# Altium PCB ex1 copy_2021-06-25.pcbdoc
Units mm, origin at the board's own origin, x right, y up, seen from the top; angles counter-clockwise.
Board outline 270.76 x 197.61 mm, 2 copper layers (Top Layer, Bottom Layer); 18 components, 46 nets, 138 pads, 20 vias.
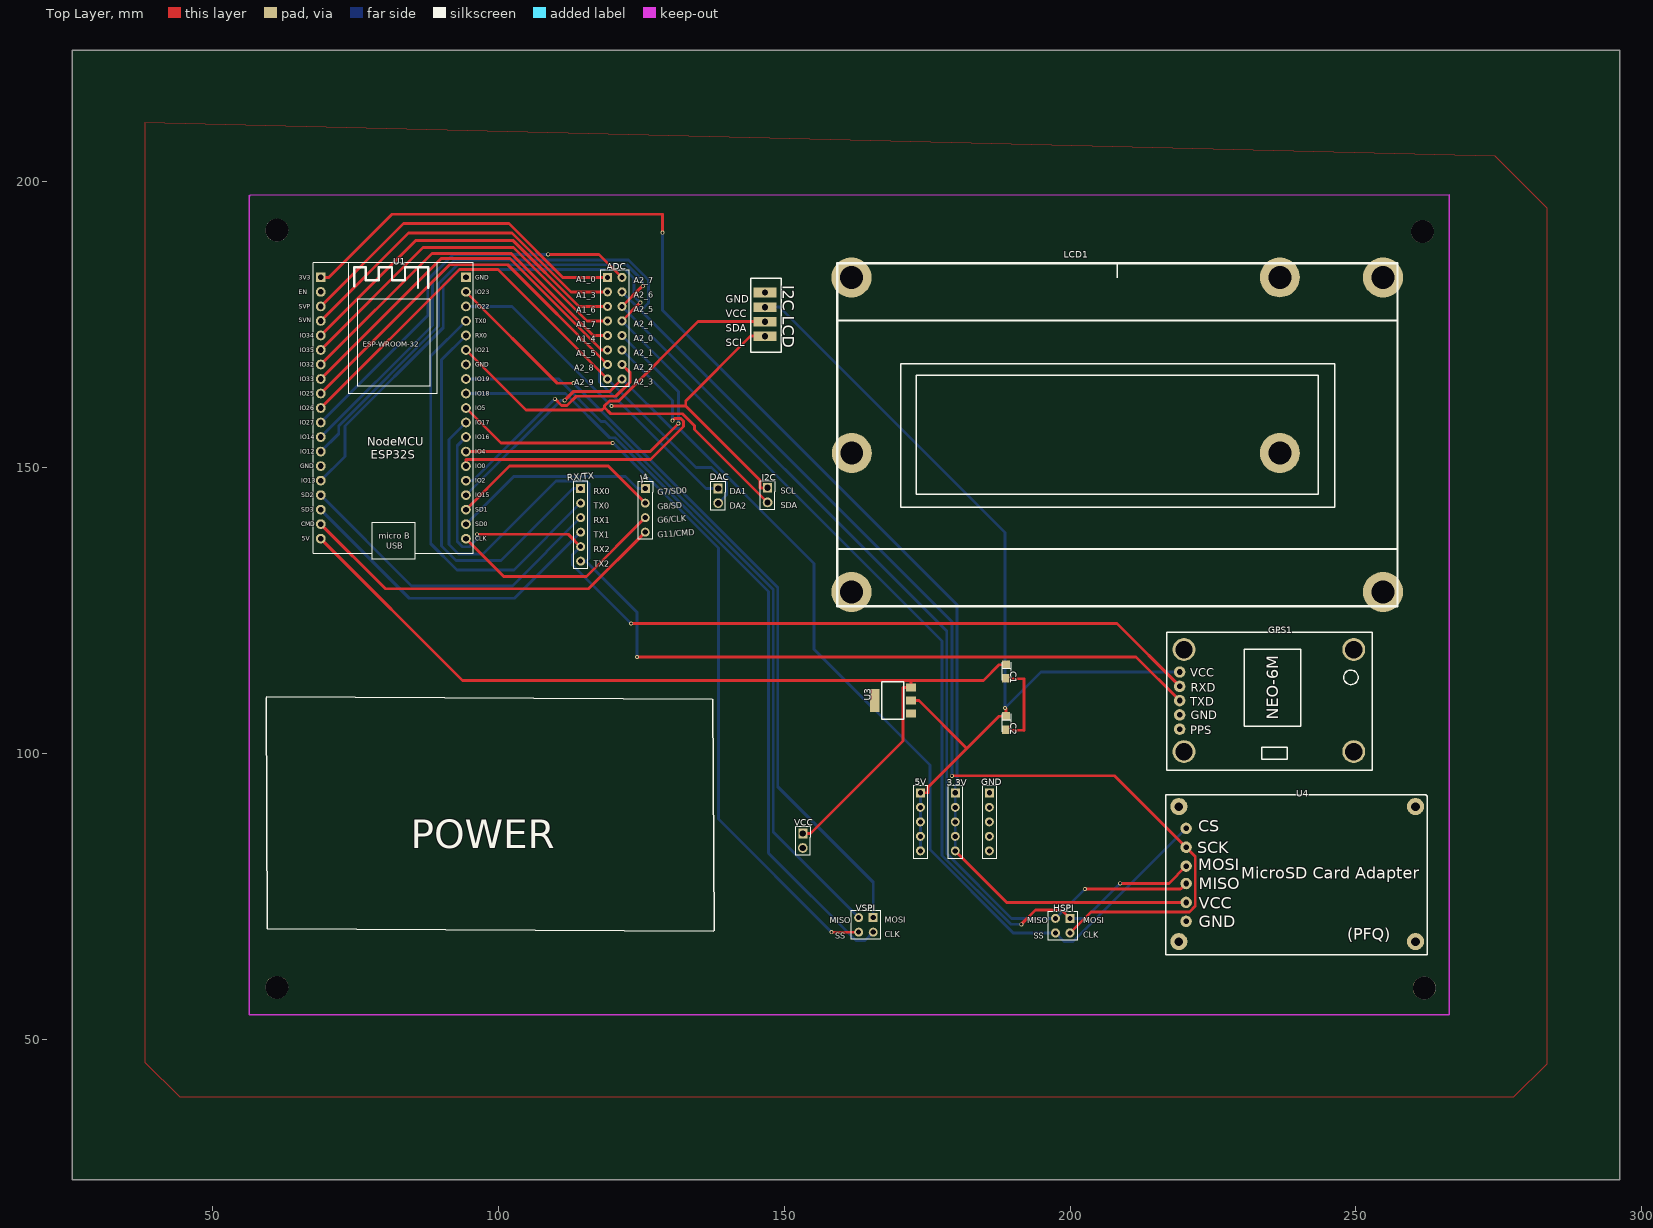
[diagram p0: Top Layer view]
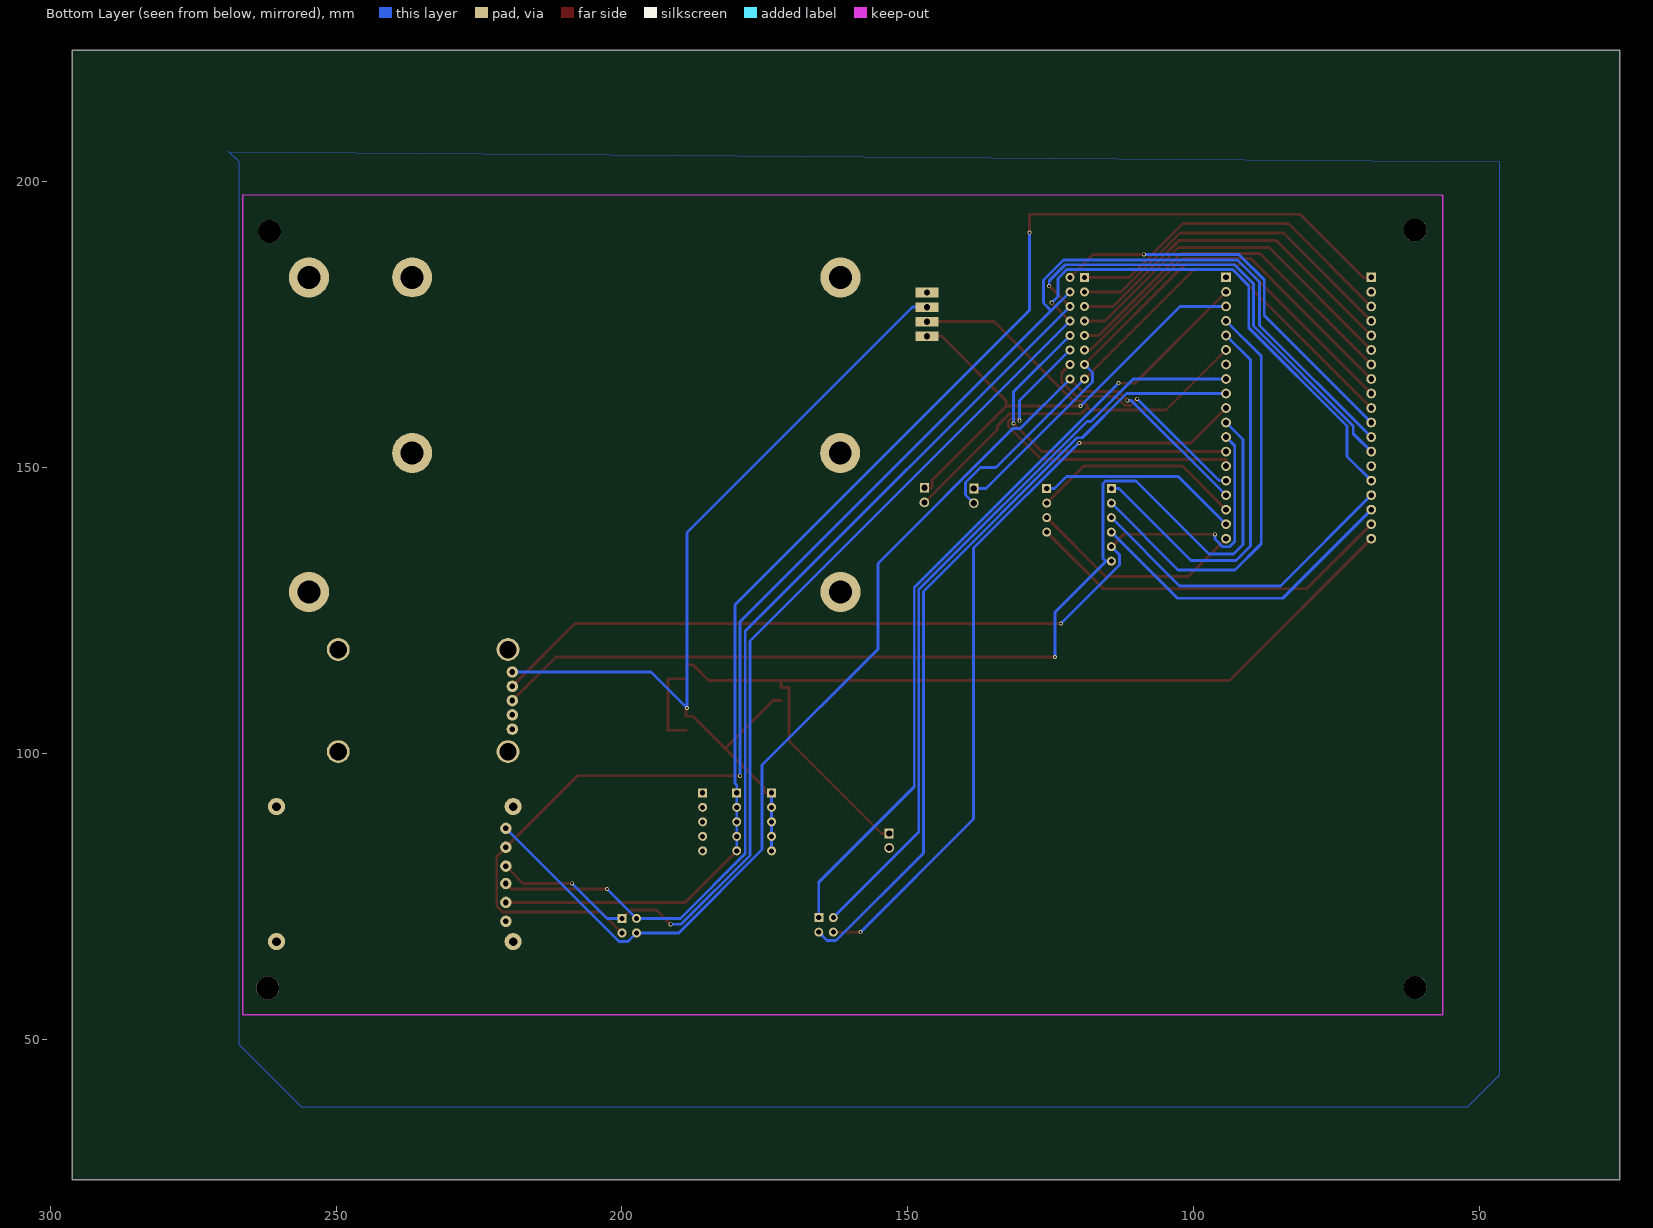
[diagram p1: Bottom Layer view, seen from below]

## Layer stack, top to bottom
Top Layer: signal copper (thickness not stored)
Dielectric: dielectric 0.32, FR-4, Dk 4.8
Bottom Layer: signal copper (thickness not stored)

## Board outline
296.164,25.4 25.4,25.4 25.4,223.012 296.164,223.012

## Components (designator, comment, footprint, x,y, rotation, side; value= is the part's Value field where it differs from the comment)
3.3V "3.3V" HDR-M-2.54_1X5 179.894,88.01 r270 top
5V "5V" HDR-M-2.54_1X5 173.798,88.01 r270 top
ADC "ADC" HDR-M-2.54_2X8 120.331,174.37 r270 top
C1 "100u/16V" CASE-A_3216 188.784,114.299 r270 top
C2 "22u/16V" CASE-A_3216 188.784,105.282 r270 top
DAC "DAC" HDR-M-2.54_1X2 138.43,145.034 r270 top
GND "GND" HDR-M-2.54_1X5 185.863,88.01 r270 top
GPS1 "Ublox Neo-m8n module_MOP" UBLOX_NEO-6M_GPS_MODULE 234.758,109.219 r0 top
HSPI "HDR-M-2.54_2x2" HDR-M-2.54_2X2 198.69,69.849 r270 top
I2C "HDR-M-2.54_1x2" HDR-M-2.54_1X2 147.066,145.161 r270 top
J4 "HDR-M-2.54_1x4" HDR-M-2.54_1X4 125.665,142.493 r270 top
LCD1 "LCD_Display_20x4 V3 I2C" "LCD_2004_4-8BIT_IF LCD_2004_4-8BIT_IF V4 I2C" 161.86,183.133 r0 top
RX/TX "RX/TX" HDR-M-2.54_1X6 114.362,139.953 r270 top
U1 "NODEMCU_ESP32-DEVKITC" NODEMCU-ESP32S 66.356,188.34 r0 top
U3 "AMS1117" AMS1117 164.781,105.917 r90 top
U4 "MICRO SD CARD ADAPTER ARDUINO" "MICROSD CARD ADAPTER (PFQ)" 239.33,78.993 r0 top
VCC "VCC/GND 5V-14V" HDR-M-2.54_1X2 153.224,84.708 r270 top
VSPI "HDR-M-2.54_2x2" HDR-M-2.54_2X2 164.273,69.976 r270 top

## Footprints (in the part's own frame and the unit in brackets; to place one, negate y for a bottom-side part, rotate by r counter-clockwise, add the part's x,y. Pads: shape width x height; smd on the part's side, far side on the other; paste and mask are expansions set on the pad)
AMS1117 [mm]
  rect 1.4x1.7 smd: 1(1.016,-7.366) 2(3.302,-7.366) 3(5.588,-7.366)
  rect 4x1.7 smd: 4(3.302,-1.016)
  silkscreen extent 0,-6.1 6.6,-2.29
CASE-A_3216 [mm]
  rect 1.5x1.359 smd: 1(-1.2,0) 2(1.2,0)
  silkscreen extent -1.64,-0.76 1.56,0.84
HDR-M-2.54_1X2 [mm]
  rect 1.7x1.575 hole 1.1: 1(-1.27,0)
  round 1.7 hole 1.1: 2(1.27,0)
  silkscreen extent -2.54,-1.27 2.54,1.27
HDR-M-2.54_1X4 [mil]
  rect 62x62 hole 35: 1(-150,0)
  round 62 hole 35: 2(-50,0) 3(50,0) 4(150,0)
  silkscreen extent -200,-50 200,50
HDR-M-2.54_1X5 [mil]
  rect 62x62 hole 35: 1(-200,0)
  round 62 hole 35: 2(-100,0) 3(0,0) 4(100,0) 5(200,0)
  silkscreen extent -250,-50 250,50
HDR-M-2.54_1X6 [mil]
  rect 62x62 hole 35: 1(-250,0)
  round 62 hole 35: 2(-150,0) 3(-50,0) 4(50,0) 5(150,0) 6(250,0)
  silkscreen extent -300,-50 300,50
HDR-M-2.54_2X2 [mil]
  rect 62x62 hole 35: 1(-50,50)
  round 62 hole 35: 2(50,50) 3(-50,-50) 4(50,-50)
  silkscreen extent -100,-100 100,100
HDR-M-2.54_2X8 [mil]
  rect 62x62 hole 35: 1(-350,-50)
  round 62 hole 35: 2(-350,50) 3(-250,-50) 4(-250,50) 5(-150,-50) 6(-150,50) 7(-50,-50) 8(-50,50) 9(50,-50) 10(50,50) 11(150,-50) 12(150,50) 13(250,-50) 14(250,50) 15(350,-50) 16(350,50)
  silkscreen extent -400,-100 400,100
"LCD_2004_4-8BIT_IF LCD_2004_4-8BIT_IF V4 I2C" [mm]
  rect 4x1.7 hole 1.1: 1(-15.24,-2.54) 2(-15.24,-5.08) 3(-15.24,-7.62) 4(-15.24,-10.16)
  round 7 hole 4: 1(-0.123,-54.905) 1(-0.123,0.097) 1(92.877,-54.905) 1(92.877,0.097)
  silkscreen extent -17.78,-57.4 95.38,2.6
"MICROSD CARD ADAPTER (PFQ)" [mm]
  round 2 hole 1: 1(-19.05,7.874) 2(-19.05,4.572) 3(-19.05,1.27) 4(-19.05,-1.778) 5(-19.05,-5.08) 6(-19.05,-8.382)
  round 3 hole 1.5: 7(21.082,11.684) 8(21.082,-11.938) 9(-20.32,-11.938) 10(-20.32,11.684)
  silkscreen extent -22.61,-14.22 23.11,13.72
NODEMCU-ESP32S [mm]
  rect 1.7x1.7 hole 1: 1(2.54,-5.08) 38(27.94,-5.08)
  round 1.7 hole 1: 2(2.54,-7.62) 3(2.54,-10.16) 4(2.54,-12.7) 5(2.54,-15.24) 6(2.54,-17.78) 7(2.54,-20.32) 8(2.54,-22.86) 9(2.54,-25.4) 10(2.54,-27.94) 11(2.54,-30.48) 12(2.54,-33.02) 13(2.54,-35.56) 14(2.54,-38.1) 15(2.54,-40.64) 16(2.54,-43.18) 17(2.54,-45.72) 18(2.54,-48.26) 19(2.54,-50.8) 20(27.94,-50.8) 21(27.94,-48.26) 22(27.94,-45.72) 23(27.94,-43.18) 24(27.94,-40.64) 25(27.94,-38.1) 26(27.94,-35.56) 27(27.94,-33.02) 28(27.94,-30.48) 29(27.94,-27.94) 30(27.94,-25.4) 31(27.94,-22.86) 32(27.94,-20.32) 33(27.94,-17.78) 34(27.94,-15.24) 35(27.94,-12.7) 36(27.94,-10.16) 37(27.94,-7.62)
  silkscreen extent 1.27,-54.32 29.21,-2.54
UBLOX_NEO-6M_GPS_MODULE [mm]
  round 2 hole 1: 1(-15.6,5) 2(-15.6,2.5) 3(-15.6,0) 4(-15.6,-2.5) 5(-15.6,-5)
  round 4 hole 3.05: 11(-14.85,8.925) 12(14.85,8.925) 13(14.85,-8.925) 14(-14.85,-8.925)
  silkscreen extent -17.87,-12.22 18.13,11.95

## Free pads (board coordinates)
  round 7 hole 4: 1(161.798,152.527) 1(236.677,152.53) 1(236.677,183.251)
  round 4 hole 4 unplated: ""(61.214,59.055) ""(61.214,191.516) ""(261.62,191.262) ""(261.936,58.927)
  round 3 hole 3 unplated: ""(161.798,152.527) ""(236.677,152.53) ""(236.677,183.251)

## Via types
v1: diameter 0.7, hole 0.4, Top Layer to Bottom Layer, 20 vias

## Nets (pads, with @x,y where several pads share a name; then routed paths per layer and width w, separated by ;. In a path a pad name is that pad's centre, name@x,y a point inside that pad or via, vN(x,y) a via of type N, cw(c..) or ccw(c..) an arc to the next point about the centre after c; other vN are vias at no path point)
3.3V: 3.3V.1 3.3V.2 3.3V.3 3.3V.4 3.3V.5 U1.1 U4.5 | length 241.3
  Top Layer w0.5: U1.1 70.3,183.258 81.351,194.31 128.692,194.31 v1(128.692,191.084) ; 3.3V.5@179.895,82.928 188.912,73.911 U4.5@220.281,73.911
  Bottom Layer w0.5: v1(128.692,191.084) 128.692,177.508 180.208,125.989 180.208,94.745 179.895,94.43 179.895,93.088 179.895,90.548 179.895,88.008 179.895,85.468 3.3V.5@179.895,82.928
5V: 5V.1 5V.2 5V.3 5V.4 5V.5 C2.1 GPS1.1 LCD1.2 U3.2 | length 168.2
  Top Layer w0.5: U3.2@172.148,109.217 173.551,109.217 181.92,100.848 ; 5V.1@173.799,93.088 175.138,93.088 175.138,94.066 181.92,100.848 ; v1(188.613,107.909) 188.737,107.785 188.785,107.785 C2.1 188.168,106.482 187.554,106.482 181.92,100.848
  Bottom Layer w0.5: LCD1.2@146.621,178.051 149.172,178.051 188.613,138.613 v1(188.613,107.909) 194.922,114.219 GPS1.1 ; 5V.5@173.799,82.928 173.799,85.468 173.799,88.008 173.799,90.548 5V.1@173.799,93.088
C1_2: C1.2 C2.2 | length 15.2
  Top Layer w0.5: C2.2 191.897,104.013 191.897,113.03 C1.2
G0/T1: ADC.12 U1.25 | length 60.9
  Top Layer w0.5: U1.25@94.297,150.238 94.297,151.384 126.555,151.384 132.364,157.193 132.364,158.097 131.864,158.595 130.835,158.595 v1(130.424,158.184)
  Bottom Layer w0.5: ADC.12@121.602,170.558 130.421,161.74 130.421,158.184 v1(130.424,158.184)
G1/TX0: RX/TX.2 U1.35 | length 74.5
  Bottom Layer w0.5: U1.35@94.297,175.638 88.138,169.479 88.138,136.652 92.71,132.08 102.682,132.08 RX/TX.2@114.364,143.761
G2/T2: ADC.14 U1.24 | length 40.5
  Top Layer w0.5: v1(109.852,162.022) 111.016,160.858 112.001,160.858 113.602,162.456 120.51,162.456 123.035,164.981 123.035,166.586 ADC.14@121.602,168.018
  Bottom Layer w0.5: U1.24@94.297,147.698 95.529,147.698 v1(109.852,162.022)
G3/RX0: RX/TX.1 U1.34 | length 69.2
  Bottom Layer w0.5: U1.34@94.297,173.098 90.043,168.844 90.043,136.271 92.583,133.731 100.452,133.731 113.022,146.301 RX/TX.1@114.364,146.301
G4/T0: ADC.10 U1.26 | length 58.7
  Top Layer w0.5: U1.26@94.297,152.778 126.54,152.778 v1(131.455,157.693)
  Bottom Layer w0.5: ADC.10@121.602,173.098 131.455,163.246 v1(131.455,157.693)
G5/V_SS: U1.29 VSPI.4 | length 134.5
  Top Layer w0.5: U1.29@94.297,160.398 100.404,154.295 v1(119.967,154.295) ; v1(158.26,68.704) VSPI.4@163.005,68.704
  Bottom Layer w0.5: v1(119.967,154.295) 120.068,154.295 138.455,135.908 138.455,88.509 v1(158.26,68.704)
G6/CLK: J4.3 U1.20 | length 38.4
  Top Layer w0.5: U1.20@94.297,137.538 100.899,130.937 115.382,130.937 J4.3@125.666,141.221
G7/SD0: J4.1 U1.21 | length 35.7
  Bottom Layer w0.5: U1.21@94.297,140.078 102.662,148.445 122.184,148.445 124.325,146.301 J4.1@125.666,146.301
G8/SD1: J4.2 U1.22 | length 37.2
  Top Layer w0.5: U1.22@94.297,142.618 101.92,150.241 119.187,150.241 J4.2@125.666,143.761
G9/RX1/SD2: RX/TX.3 U1.16 | length 57
  Bottom Layer w0.5: U1.16@68.897,145.158 84.77,129.286 102.428,129.286 RX/TX.3@114.364,141.221
G10/TX1/SD3: RX/TX.4 U1.17 | length 56.7
  Bottom Layer w0.5: U1.17@68.897,142.618 84.389,127.127 102.809,127.127 RX/TX.4@114.364,138.681
G11/CMD: J4.4 U1.18 | length 65.6
  Top Layer w0.5: U1.18@68.897,140.078 80.198,128.778 115.763,128.778 J4.4@125.666,138.681
G12/MISO: ADC.6 HSPI.3 U1.13 U4.4 | length 250.5
  Top Layer w0.5: ADC.6@121.602,178.178 125.128,181.707 v1(125.237,181.707) ; v1(202.565,76.263) 219.329,76.263 U4.4@220.281,77.213
  Bottom Layer w0.5: U1.13@68.897,152.778 72.032,155.913 72.032,157.284 89.515,174.767 89.515,182.138 92.842,185.466 122.428,185.466 125.237,182.654 v1(125.237,181.707) ; ADC.6@121.602,178.178 178.405,121.376 178.405,82.474 189.761,71.117 197.421,71.117 v1(202.565,76.263)
G13/MOSI: ADC.8 HSPI.1 U1.15 U4.3 | length 257.2
  Top Layer w0.5: ADC.8@121.602,175.638 v1(124.8,178.839) ; v1(191.442,70.086) 193.937,72.581 198.498,72.581 HSPI.1@199.962,71.117 ; v1(208.74,77.246) 217.264,77.246 U4.3@220.281,80.261
  Bottom Layer w0.5: U1.15@68.897,147.698 73.142,151.945 73.142,157.259 90.317,174.437 90.317,181.806 93.175,184.663 122.095,184.663 123.716,183.04 123.716,179.923 v1(124.8,178.839) ; ADC.8@121.602,175.638 177.602,119.639 177.602,82.141 189.657,70.086 v1(191.442,70.086) ; HSPI.1@199.962,71.117 202.611,71.117 v1(208.74,77.246)
G14/CLK: ADC.4 HSPI.2 U1.12 U4.2 | length 271.5
  Top Layer w0.5: v1(179.306,96.07) 207.777,96.07 220.281,83.563 221.882,81.963 221.882,73.292 220.853,72.26 203.644,72.26 HSPI.2@199.962,68.577
  Bottom Layer w0.5: U1.12@68.897,155.318 88.43,174.851 88.43,182.423 92.273,186.268 122.761,186.268 126.251,182.776 126.251,178.78 124.897,177.427 ; ADC.4@121.602,180.718 124.897,177.427 ; v1(179.306,96.07) 179.306,123.015 124.897,177.427
G15/T3/SS: ADC.16 HSPI.4 U1.23 U4.1 | length 200.8
  Top Layer w0.5: v1(111.575,161.76) 113.073,163.261 119.383,163.261 ADC.16@121.602,165.478
  Bottom Layer w0.5: U1.23@94.297,145.158 110.896,161.76 v1(111.575,161.76) ; ADC.16@121.602,165.478 130.289,156.792 131.608,156.792 155.204,133.195 155.204,118.201 175.456,97.947 175.456,83.152 190.03,68.577 197.421,68.577 198.938,67.061 200.475,67.061 U4.1@220.281,86.865
G16/RX2: GPS1.2 RX/TX.5 U1.27 | length 162
  Top Layer w0.5: v1(96.218,138.311) 112.194,138.311 RX/TX.5@114.364,136.141 ; v1(123.193,122.695) 208.183,122.695 GPS1.2
  Bottom Layer w0.5: U1.27@94.297,155.318 92.773,153.797 92.773,137.061 93.698,136.136 94.897,136.136 96.218,137.46 v1(96.218,138.311) ; RX/TX.5@114.364,136.141 112.941,134.722 112.941,132.946 v1(123.193,122.695)
G17/TX2: GPS1.3 RX/TX.6 U1.28 | length 186.5
  Top Layer w0.5: v1(124.224,116.85) 211.529,116.85 GPS1.3
  Bottom Layer w0.5: U1.28@94.297,157.858 91.313,154.874 91.313,136.525 92.964,134.874 97.282,134.874 110.051,147.643 115.379,147.643 115.799,147.221 115.799,134.102 115.301,133.601 ; RX/TX.6@114.364,133.601 115.301,133.601 ; v1(124.224,116.85) 124.224,124.678 115.301,133.601
G18/V_SCK: U1.30 VSPI.2 | length 138.3
  Bottom Layer w0.5: U1.30@94.297,162.938 111.707,162.938 119.449,155.197 120.348,155.197 147.241,128.3 147.241,82.527 162.507,67.262 164.099,67.262 VSPI.2@165.544,68.704
G19/V_MISO: U1.31 VSPI.3 | length 132.6
  Bottom Layer w0.5: U1.31@94.297,165.478 110.533,165.478 117.947,158.067 118.623,158.067 148.046,128.646 148.046,86.205 VSPI.3@163.005,71.244
G21/I2CSDA: I2C.2 LCD1.3 U1.33 | length 99
  Top Layer w0.5: U1.33@94.297,170.558 104.803,160.056 118.067,160.056 118.519,160.508 ; LCD1.3@146.621,175.511 134.889,175.511 121.031,161.653 119.385,161.653 118.519,160.79 118.519,160.508 ; I2C.2 134.285,156.672 134.285,157.312 132.197,159.398 119.629,159.398 118.519,160.508
G22/I2CSCL: I2C.1 LCD1.4 U1.36 | length 86.2
  Top Layer w0.5: v1(119.758,160.752) 132.745,160.752 ; LCD1.4@146.621,172.971 144.069,172.971 132.745,161.648 132.745,160.752 ; I2C.1 145.727,146.431 145.727,147.77 132.745,160.752
  Bottom Layer w0.5: U1.36@94.297,178.178 102.332,178.178 v1(119.758,160.752)
G23/V_MOSI: U1.37 VSPI.1 | length 140.7
  Top Layer w0.5: U1.37@94.297,180.718 110.279,164.737 v1(113.129,164.737)
  Bottom Layer w0.5: v1(113.129,164.737) 148.849,129.019 148.849,94.145 165.544,77.45 VSPI.1@165.544,71.244
G25/DA1: ADC.13 DAC.1 U1.9 | length 98.9
  Top Layer w0.5: U1.9@68.897,162.938 91.422,185.466 101.618,185.466 ADC.13@119.062,168.018
  Bottom Layer w0.5: ADC.13@119.062,168.018 117.648,166.606 117.648,164.925 136.271,146.304 DAC.1
G26/DA2: ADC.15 DAC.2 U1.10 | length 100.7
  Top Layer w0.5: U1.10@68.897,160.398 93.16,184.661 99.88,184.661 ADC.15@119.062,165.478
  Bottom Layer w0.5: ADC.15@119.062,165.478 134.529,150.012 137.251,150.012 139.863,147.399 139.863,145.197 DAC.2
G27: ADC.2 U1.11 | length 70.2
  Top Layer w0.5: v1(108.684,187.277) 117.584,187.277 ADC.2@121.602,183.258
  Bottom Layer w0.5: U1.11@68.897,157.858 87.625,176.588 87.625,182.837 92.065,187.277 v1(108.684,187.277)
G32/A4: ADC.9 U1.7 | length 64.2
  Top Layer w0.5: U1.7@68.897,168.018 88.331,187.452 102.222,187.452 116.576,173.098 ADC.9@119.062,173.098
G33/A5: ADC.11 U1.8 | length 65.5
  Top Layer w0.5: U1.8@68.897,165.478 89.982,186.563 101.976,186.563 117.98,170.558 ADC.11@119.062,170.558
G34/A6: ADC.5 U1.5 | length 61.8
  Top Layer w0.5: U1.5@68.897,173.098 85.537,189.738 102.492,189.738 114.051,178.178 ADC.5@119.062,178.178
G35/A7: ADC.7 U1.6 | length 62.9
  Top Layer w0.5: U1.6@68.897,170.558 86.807,188.468 102.626,188.468 115.456,175.638 ADC.7@119.062,175.638
G36/A0/SVP: ADC.1 U1.3 | length 60.1
  Top Layer w0.5: U1.3@68.897,178.178 83.378,192.659 101.841,192.659 111.242,183.258 117.721,183.258 ADC.1@119.062,183.258
G39/A3/SVN: ADC.3 U1.4 | length 60.8
  Top Layer w0.5: U1.4@68.897,175.638 84.267,191.008 102.357,191.008 112.646,180.718 ADC.3@119.062,180.718
GND: GND.1 GND.2 GND.3 GND.4 GND.5 GPS1.4 LCD1.1 pad.1 U1.14 U1.32 U1.38 U3.1 U4.6 VCC.2
RST/EN: U1.2
S$43: 
S$59: 
S$63: 
S$68: 
S$71: 
S$560: 
S$562: 
S$564: 
VCC: C1.1 U1.19 U3.3 VCC.1 | length 167.5
  Top Layer w0.5: U1.19@68.897,137.538 93.678,112.758 172.148,112.758 ; VCC.1@153.225,85.976 154.564,85.976 170.744,102.159 170.744,111.503 172.148,111.503 172.148,112.758 ; C1.1 187.554,115.499 184.813,112.758 172.148,112.758
pads on no net: GPS1.5 GPS1.11 GPS1.12 GPS1.13 GPS1.14 U3.4 U4.7 U4.8 U4.9 U4.10

## Polygon pours and split planes (outlines as drawn)
GND on Top Layer (solid): 38.1,210.312 38.1,45.974 44.196,39.878 277.622,39.878 283.464,45.72 283.464,195.326 274.32,204.47
GND on Bottom Layer (solid): 46.482,203.454 46.482,43.688 52.07,38.1 256.032,38.1 266.954,49.022 266.954,203.454 268.732,205.232

## Silkscreen, mask and mechanical layers (free items; w line width, h text height)
Top Overlay:
  lines w0.254: 59.371,109.727 59.498,69.341 ; 59.371,109.854 137.349,109.473 ; 59.572,69.305 137.657,68.868 ; 137.466,109.445 137.73,68.96
  text "A1_0" at 113.6,182.379 h1
  text "A2_7" at 123.633,182.252 h1
  text "A2_6" at 123.633,179.712 h1
  text "A1_3" at 113.6,179.585 h1
  text "A2_5" at 123.633,177.172 h1
  text "A1_6" at 113.6,177.045 h1
  text "A2_4" at 123.633,174.632 h1
  text "A1_7" at 113.6,174.505 h1
  text "A2_0" at 123.633,172.092 h1
  text "A1_4" at 113.6,171.965 h1
  text "A2_1" at 123.633,169.552 h1
  text "A1_5" at 113.6,169.425 h1
  text "A2_2" at 123.633,167.012 h1
  text "A2_8" at 113.219,166.885 h1
  text "A2_3" at 123.633,164.472 h1
  text "A2_9" at 113.219,164.345 h1
  text "SCL" at 149.352,145.423 h1
  text "RX0" at 116.648,145.295 h1
  text "DA1" at 140.462,145.296 h1
  text "G7/SD0" at 127.859,145.169 h1 r4
  text "SDA" at 149.352,142.883 h1
  text "TX0" at 116.648,142.755 h1
  text "DA2" at 140.462,142.756 h1
  text "G8/SD" at 127.859,142.629 h1 r4
  text "RX1" at 116.648,140.215 h1
  text "G6/CLK" at 127.859,140.216 h1 r4
  text "TX1" at 116.648,137.675 h1
  text "G11/CMD" at 127.859,137.676 h1 r4
  text "RX2" at 116.648,135.135 h1
  text "TX2" at 116.648,132.595 h1
  text "POWER" at 84.644,83.351 h5
  text "MOSI" at 167.575,70.365 h1
  text "MISO" at 157.923,70.238 h1
  text "MISO" at 192.467,70.238 h1
  text "MOSI" at 202.246,70.238 h1
  text "CLK" at 167.575,67.825 h1
  text "CLK" at 202.246,67.698 h1
  text "SS" at 158.939,67.571 h1
  text "SS" at 193.61,67.571 h1

## Text inside footprints (layer, text, board x,y; h text height)
GPS1: Top Overlay "NEO-6M" at 236.374,105.86 h2.03 r90; Top Overlay "VCC" at 221.041,113.366 h1.5; Top Overlay "GND" at 221.107,105.93 h1.5; Top Overlay "TXD" at 221.041,108.35 h1.5; Top Overlay "RXD" at 221.107,110.756 h1.5; Top Overlay "PPS" at 221.041,103.333 h1.5
LCD1: Top Overlay "I2C LCD" at 149.737,181.861 h2.03 r270; Top Overlay "GND" at 139.761,178.802 h1.3; Top Overlay "VCC" at 139.761,176.262 h1.3; Top Overlay "SDA" at 139.761,173.722 h1.3; Top Overlay "SCL" at 139.761,171.182 h1.3
U1: Top Overlay "CLK" at 95.947,137.159 h0.76; Top Overlay "5V" at 65.594,137.159 h0.76; Top Overlay "SD2" at 65.467,144.779 h0.76; Top Overlay "USB" at 80.326,135.77 h1; Top Overlay "micro B" at 79.056,137.548 h1; Top Overlay "ESP-WROOM-32" at 76.262,171.126 h0.9; Top Overlay "IO13" at 65.467,147.319 h0.76; Top Overlay "GND" at 65.34,149.859 h0.76; Top Overlay "IO12" at 65.34,152.399 h0.76; Top Overlay "IO14" at 65.34,154.939 h0.76; Top Overlay "IO27" at 65.213,157.479 h0.76; Top Overlay "IO26" at 65.213,160.019 h0.76; Top Overlay "IO25" at 65.213,162.559 h0.76; Top Overlay "IO33" at 65.213,165.099 h0.76; Top Overlay "IO32" at 65.213,167.639 h0.76; Top Overlay "IO35" at 65.213,170.179 h0.76; Top Overlay "IO34" at 65.213,172.719 h0.76; Top Overlay "SVN" at 65.086,175.386 h0.76; Top Overlay "SVP" at 65.086,177.799 h0.76; Top Overlay "RX0" at 95.947,172.719 h0.76; Top Overlay "IO15" at 95.947,144.779 h0.76; Top Overlay "IO2" at 95.947,147.319 h0.76; Top Overlay "IO0" at 95.947,149.859 h0.76; Top Overlay "IO4" at 95.947,152.399 h0.76; Top Overlay "IO16" at 95.947,154.939 h0.76; Top Overlay "IO17" at 95.947,157.479 h0.76; Top Overlay "IO5" at 95.947,160.019 h0.76; Top Overlay "IO18" at 95.947,162.559 h0.76; Top Overlay "IO19" at 95.947,165.099 h0.76; Top Overlay "GND" at 95.947,167.639 h0.76; Top Overlay "IO21" at 95.947,170.179 h0.76; Top Overlay "TX0" at 95.947,175.259 h0.76; Top Overlay "IO22" at 95.947,177.799 h0.76; Top Overlay "IO23" at 95.947,180.339 h0.76; Top Overlay "EN" at 65.086,180.339 h0.76; Top Overlay "SD1" at 95.947,142.239 h0.76; Top Overlay "SD0" at 95.947,139.699 h0.76; Top Overlay "GND" at 95.947,182.879 h0.76; Top Overlay "3V3" at 65.086,182.879 h0.76; Top Overlay "SD3" at 65.467,142.239 h0.76; Top Overlay "CMD" at 65.467,139.699 h0.76; Top Overlay "NodeMCU /  ESP32S" at 77.024,151.522 h1.5
U4: Top Overlay "MicroSD Card Adapter" at 229.932,78.045 h2.03; Top Overlay "(PFQ)" at 248.474,67.354 h2.03; Top Overlay "GND" at 222.504,69.596 h2.03; Top Overlay "VCC" at 222.504,72.771 h2.03; Top Overlay "MISO" at 222.504,76.2 h2.03; Top Overlay "MOSI" at 222.377,79.502 h2.03; Top Overlay "SCK" at 222.25,82.55 h2.03; Top Overlay "CS" at 222.377,86.233 h2.03